# Altium PCB Hero_Chassis_PCB.PcbDoc
Units mil, origin at the board's own origin, x right, y up, seen from the top; angles counter-clockwise.
Board outline 2952.76 x 1771.65 mil, 2 copper layers (Top Layer, Bottom Layer); 15 components, 15 nets, 51 pads, 0 vias.
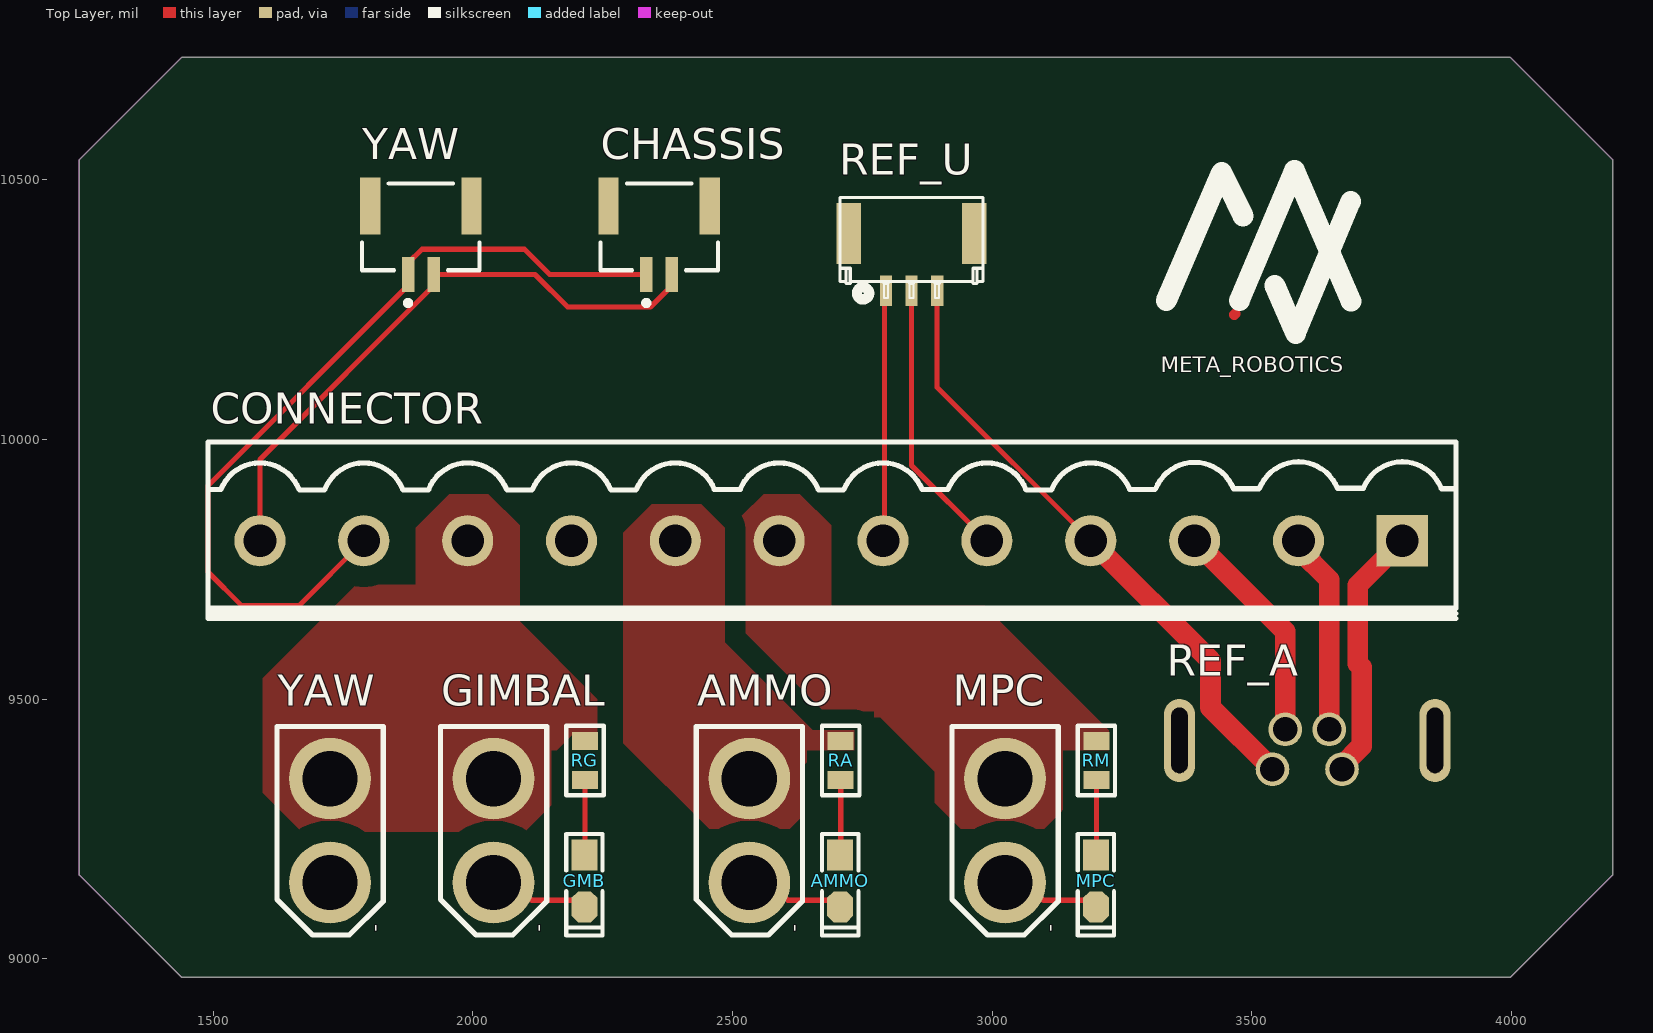
[diagram p0: Top Layer view]
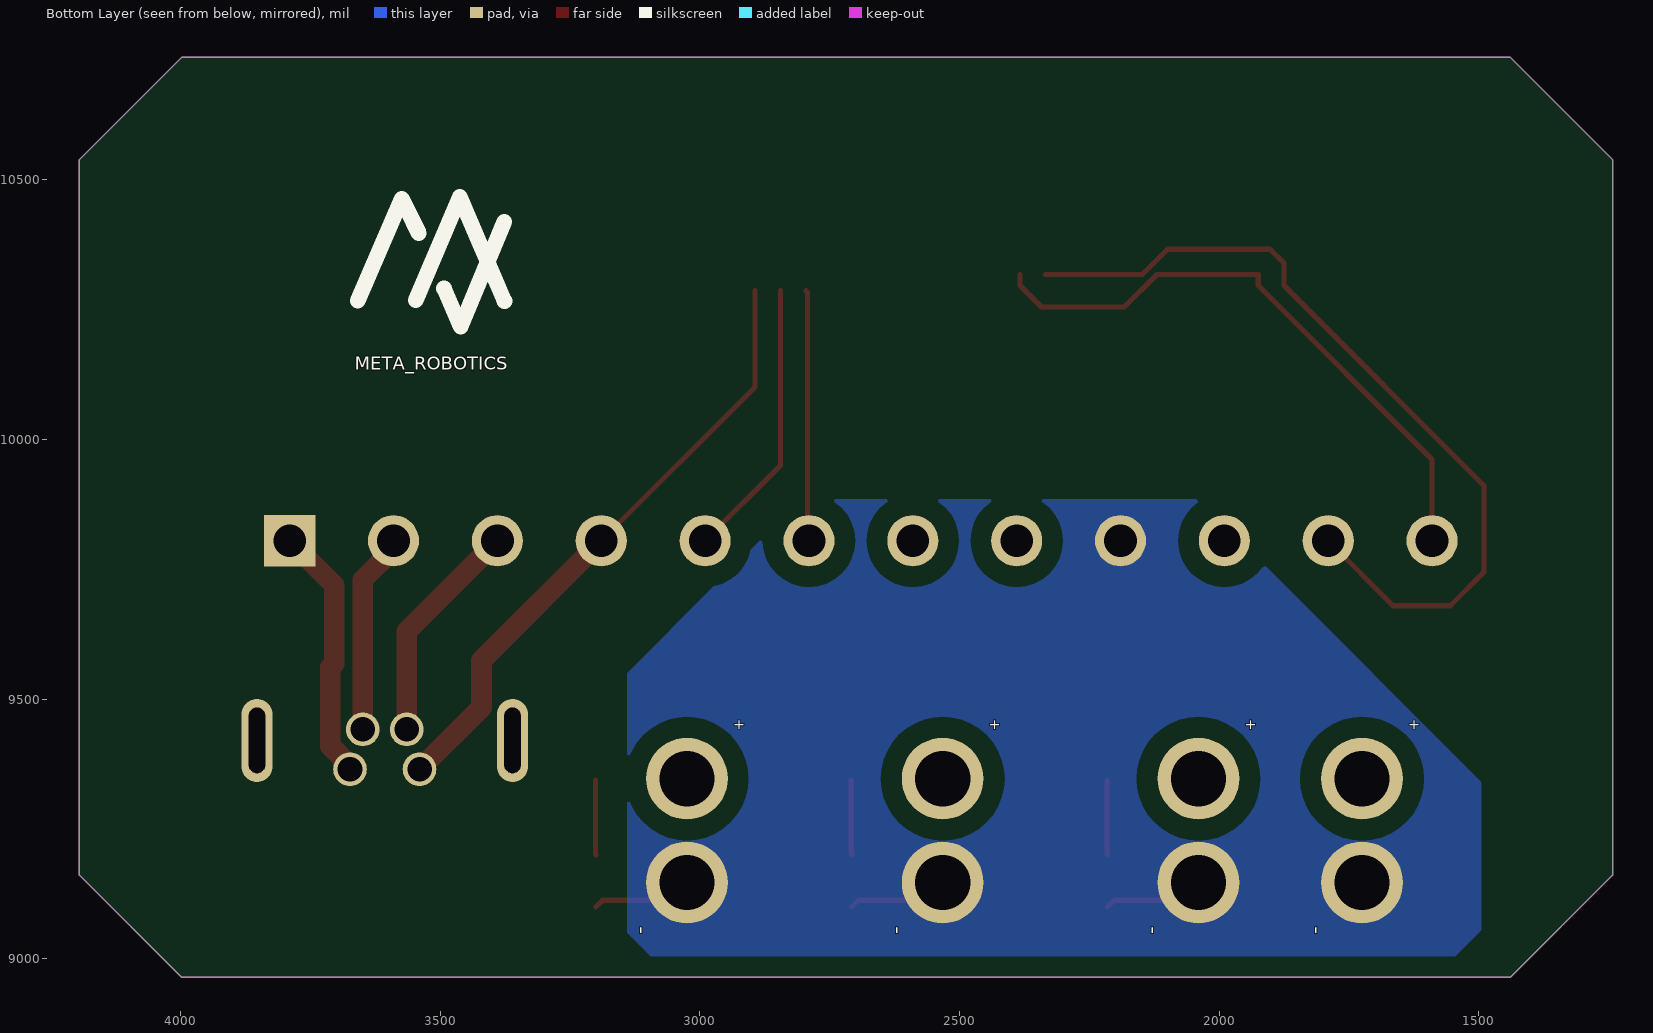
[diagram p1: Bottom Layer view, seen from below]

## Layer stack, top to bottom
Top Solder: solder mask 0.4, Solder Resist, Dk 3.5
Top Layer: signal copper 1.4
Dielectric 1: dielectric 12.6, FR-4, Dk 4.8
Bottom Layer: signal copper 1.4
Bottom Solder: solder mask 0.4, Solder Resist, Dk 3.5

## Board outline
1439.14,8964.25 1242.29,9161.1 1242.29,10539.05 1439.14,10735.9 3998.19,10735.9 4195.04,10539.05 4195.04,9161.1 3998.19,8964.25

## Design rules (kind name [scope] priority, off if disabled: settings)
Clearance [InPolygon] p1: gap=40 ignorepadtopadclearanceinfootprint=FALSE
PlaneClearance [All] p1: clearance=40
PlaneConnect [All] p1: planeconnectstyle=Direct reliefexpansion=20 reliefentries=4 reliefconductorwidth=10 reliefairgap=10
PolygonConnect [All] p1: connectstyle=Direct reliefconductorwidth=10 reliefentries=4 polygonreliefangle="90 Angle" airgapwidth=10
RoutingVias [All] p1: holewidth=28 width=50 viastyle="Through Hole" minholewidth=28 minwidth=50 maxholewidth=28 maxwidth=50
SolderMaskExpansion [All] p1: expansion=4 istentingtop=FALSE
Width [All] p1: maxlimit=80 minlimit=10 preferedwidth=40
28 further rules are at their usual default settings.

## Classes and differential pairs
component class Schematic: AMMO CHASSIS CONNECTOR GIMBAL GMB MPC RA REF_A REF_U RG RM YAW

## Components (designator, comment, footprint, x,y, rotation, side; value= is the part's Value field where it differs from the comment)
AMMO "XT PLUGIN" XT30-M 2532.5,9246.79 r270 top
AMMO "红色" "LED 0805G" 2707.5,9150 r270 top
CHASSIS "CAN1" JST-BM02B-GHS-TBT_V 2358.72,10383.95 r0 top
CONNECTOR "HDR-1X12" KF2EDGK5.08-LI-12P 2690,9805 r180 top
GIMBAL "XT PLUGIN" XT30-M 2040,9246.79 r270 top
GMB "红色" "LED 0805G" 2215.01,9150 r270 top
MPC "XT PLUGIN" XT30-M 3024.99,9246.79 r270 top
MPC "红色" "LED 0805G" 3200,9150 r270 top
RA "10K" "R 0805_L" 2708.51,9381.86 r270 top
REF_A "Referee_Air" "M8 Connector" 3606.93,9402.4 r0 top
REF_U "gh1.25_3p" GH1.25-LS-3P 2845,10385 r180 top
RG "10K" "R 0805_L" 2216.01,9381.86 r270 top
RM "10K" "R 0805_L" 3201,9381.86 r270 top
YAW "CAN1" JST-BM02B-GHS-TBT_V 1900,10383.95 r0 top
YAW "XT PLUGIN" XT30-M 1725,9246.79 r270 top

## Footprints (in the part's own frame and the unit in brackets; to place one, negate y for a bottom-side part, rotate by r counter-clockwise, add the part's x,y. Pads: shape width x height; smd on the part's side, far side on the other; paste and mask are expansions set on the pad)
GH1.25-LS-3P [mm] "A1257WR-S-3P"
  rect 1.2x3 smd: 0(-3.075,-0.3) 0(3.075,-0.3)
  rect 0.6x1.5 smd: 1(1.25,2.5) 2(0,2.5) 3(-1.25,2.5)
  silkscreen extent -3.5,-2.05 3.5,2.93, body extent -3.5,-2.15 3.5,2.25, height 4.2
JST-BM02B-GHS-TBT_V [mm] "Connector, 2-Leads, Body 5.75x4.25mm, Pitch 1.25mm"
  rect 0.6x1.7 smd: 1(-0.625,-1.675) 2(0.625,-1.675)
  rect 1x2.8 smd: MP1(-2.475,1.675) MP2(2.475,1.675)
  silkscreen extent -2.88,-3.2 2.88,2.78, body extent -2.88,-2.17 2.87,2.78, height 4.21
KF2EDGK5.08-LI-12P [mm] "立插端子"
  rect 2.5x2.5 hole 1.6: 1(-27.94,0)
  round 2.5 hole 1.6: 2(-22.86,0) 3(-17.78,0) 4(-12.7,0) 5(-7.62,0) 6(-2.54,0) 7(2.54,0) 8(7.62,0) 9(12.7,0) 10(17.78,0) 11(22.86,0) 12(27.94,0)
  silkscreen extent -30.56,-4.83 30.48,3.81, body extent -30.48,-4.75 30.48,3.75, height 11.25
"LED 0805G" [mil] "绿色0805LED                              淘宝ID:黄晶宝石"
  rect 60x50 smd: 1(-50,0)
  oct 60x50 smd: 2(50,0)
  silkscreen extent -90,-35 105,35, body extent -39,-25 39,25, height 32
"M8 Connector" [mm]
  round 1.65 hole 1.2: 0(-1.075,1) 1(1.075,1) 2(-1.7,-0.95) 3(1.7,-0.95)
  oval 1.524x4.064 hole 0.8 slot 3.2 at 90 deg: 4(-6.25,0.46) 5(6.25,0.46)
  body extent -6.25,-19.34 6.25,1.96, height 11.3
"R 0805_L" [mil] "1/8W贴片电阻"
  rect 35x50 smd: 1(-37.4,0) 2(37.4,0)
  silkscreen extent -67,-36 67,36, body extent -39,-25 39,25, height 20
XT30-M [mm]
  round 4 hole 2.7: 1(-2.54,0) 2(2.54,0)
  silkscreen extent -5.1,-2.6 5.11,2.6, body extent -5.18,-2.8 5.02,2.8, height 10.66

## Part data
AMMO GMB MPC: library part LED-SMD, "贴片LED", BOM名称=贴片LED, 学习资源=https://shop463601444.taobao.com, 版权归属="封装库来自淘宝 ID：黄晶宝石"
CHASSIS YAW: library part CMP-2000-05957-1, "Disconnectable Crimp Style Connector, Pitch 1.25 mm, 1 x 2 Position, Height 4.05 mm, -25 to 85 degC, RoHS, Tape and Reel", Color=Natural, Manufacturer=JST-Sales-America-Inc., Package Description="Disconnectable Crimp Style Connector, Pitch 1.25 mm, 1 x 2 Position, Height 4.05 mm", Package Reference=BM02B-GHS-TBT, Category=Connectors,Interconnects, Connector Type=Header,Shrouded, Contact Finish=Tin, Contact Finish Thickness=-, Contact Mating Length=-, Contact Type=OuterShroudContact, Datasheet URL=http://www.jst-mfg.com/product/pdf/eng/eGH.pdf, Datasheet Version=05/2016, Family=RectangularConnectors-Headers,MalePins, Fastening Type=LockingRamp, Features=SolderRetention, Manufacturer URL=http://www.jst.com/home2.html, Mounting Technology=SurfaceMount, Mounting Type=SurfaceMount, Number of Positions=2, Number of Positions Loaded=All, Number of Rows=1, Packaging=Digi-Reel®, Pitch="0.049\"(1.25mm)", Row Spacing=-, Series=GH, Termination=Solder
CONNECTOR: library part "Header 12", "12P接插件", BOM名称=12P接插件, 学习资源=https://shop463601444.taobao.com, 版权归属="封装库来自淘宝卖家 ID：黄晶宝石"
RA RG RM: library part R, "贴片电阻", BOM名称=贴片电阻, 封装库来自淘宝卖家 ID：黄晶宝石=其他店铺购入均为盗版，不享受售后技术支持服务，请立即申请退款, 版权归属="来自淘宝 ID：黄晶宝石", 联系售后=https://shop463601444.taobao.com

## Nets (pads, with @x,y where several pads share a name; then routed paths per layer and width w, separated by ;. In a path a pad name is that pad's centre, name@x,y a point inside that pad or via, vN(x,y) a via of type N, cw(c..) or ccw(c..) an arc to the next point about the centre after c; other vN are vias at no path point)
AMMO_DC: AMMO.1@2532.5,9346.79 CONNECTOR.8 RA.1
CAN2_H: CHASSIS.2 CONNECTOR.12 YAW.2@1924.61,10318.01 | length 1175.2
  Top Layer w10: CONNECTOR.12 1590,9961.75 1924.61,10296.35 1924.61,10318.01 2119.73,10318.01 2182.74,10255 2341.97,10255 2383.33,10296.35 CHASSIS.2
CAN2_L: CHASSIS.1 CONNECTOR.11 YAW.1@1875.39,10318.01 | length 1622.9
  Top Layer w10: CONNECTOR.11 1665,9680 1555,9680 1490,9745 1490,9910.96 1875.39,10296.35 1875.39,10318.01 1875.39,10339.66 1902.2,10366.47 2099.55,10366.47 2148.02,10318.01 CHASSIS.1
GIMBAL_DC: CONNECTOR.10 GIMBAL.1 RG.1 YAW.1@1725,9346.79
GND: AMMO.2 CONNECTOR.9 GIMBAL.2 GMB.2 MPC.2 YAW.2@1725,9146.79 | length 583.2
  Top Layer w10: GIMBAL.2 2079.91,9146.79 2114.2,9112.5 2202.51,9112.5 GMB.2 ; AMMO.2@2532.5,9146.79 2572.4,9146.79 2606.69,9112.5 2695,9112.5 AMMO.2@2707.5,9100 ; MPC.2@3024.99,9146.79 3064.9,9146.79 3099.19,9112.5 3187.5,9112.5 MPC.2@3200,9100
MPC_DC: CONNECTOR.7 MPC.1@3024.99,9346.79 RM.1
NetAMMO_1: AMMO.1@2707.5,9200 RA.2 | length 144.9
  Top Layer w10: AMMO.1@2707.5,9200 2708.5,9201 RA.2
NetGMB_1: GMB.1 RG.2 | length 144.9
  Top Layer w10: GMB.1 2216.01,9201 RG.2
NetMPC_1: MPC.1@3200,9200 RM.2 | length 144.9
  Top Layer w10: MPC.1@3200,9200 3201,9201 RM.2
REFEREE_A1: CONNECTOR.3 REF_A.0 | length 435.6
  Top Layer w40: CONNECTOR.3 3564.61,9630.39 REF_A.0
REFEREE_A2: CONNECTOR.2 REF_A.1 | length 387.8
  Top Layer w40: CONNECTOR.2 3590,9789.19 3649.25,9729.94 REF_A.1
REFEREE_A3: CONNECTOR.1 REF_A.3 | length 494.3
  Top Layer w40: REF_A.3 3673.86,9371.75 3711.73,9409.63 3711.73,9560.67 3704.23,9568.18 3704.23,9719.22 CONNECTOR.1
REFEREE_GND: CONNECTOR.4 REF_A.2 REF_U.3 | length 1189.1
  Top Layer w10: REF_U.3 2894.21,10100.79 CONNECTOR.4
  Top Layer w40: CONNECTOR.4 3420.87,9574.13 3420.87,9484.13 REF_A.2
REFEREE_UR: CONNECTOR.5 REF_U.2 | length 541.6
  Top Layer w10: REF_U.2 2845,9950 CONNECTOR.5
REFEREE_UT: CONNECTOR.6 REF_U.1 | length 484
  Top Layer w10: CONNECTOR.6 2792.89,9807.89 2792.89,10283.68 REF_U.1
pads on no net: CHASSIS.MP1 CHASSIS.MP2 REF_A.4 REF_A.5 REF_U.0 YAW.MP1 YAW.MP2
copper on no net: | length 2.6
  Top Layer w20: 3466.57,10240.39 3468.39,10242.2

## Polygon pours and split planes (outlines as drawn)
MPC_DC on Top Layer "MPC_DC_L01_P004" (solid, pour order 4): 2500,9620 2655,9465 2785,9465 2890,9360 2890,9300 2940,9250 3100,9250 3145,9295 3145,9400 3225,9400 3225,9440 2985,9680 2690,9680 2690,9835 2630,9895 2560,9895 2500,9835
AMMO_DC on Top Layer "AMMO_DC_L01_P003" (solid, pour order 3): 2345,9875 2440,9875 2485,9830 2485,9610 2655,9440 2735,9440 2735,9400 2665,9400 2635,9370 2635,9275 2610,9250 2455,9250 2290,9415 2290,9820
GIMBAL_DC on Top Layer "GIMBAL_DC_L01_P000" (solid, pour order 0): 1955,9895 1890,9830 1890,9720 1775,9720 1595,9540 1595,9320 1670,9245 2100,9245 2155,9300 2155,9395 2195,9435 2240,9435 2240,9500 2090,9650 2090,9835 2030,9895
GND on Bottom Layer "GND" (solid, pour order 5): 2040,9885 1495,9340 1495,9055 1565,8985 3075,8985 3140,9050 3140,9550 2805,9885

## Keep-outs
Keep-Out Layer:
  the board outline again, w0.5

## Silkscreen, mask and mechanical layers (free items; w line width, h text height)
Top Overlay:
  lines w40: 3335.34,10267.42 3442.15,10514.39 3483.19,10430.63 ; 3476.43,10267.91 3582.28,10518.6 3691.11,10266.31 ; 3544.35,10296.74 3584.6,10204.3 3690.53,10458.43
  text "META_ROBOTICS" at 3325,10130 h30
Bottom Overlay:
  lines w30: 3376.36,10266.7 3462.8,10467.09 3546.88,10267.97 ; 3376.82,10419.3 3460.96,10217.44 3492.93,10290.87 ; 3541.51,10397.22 3574.11,10463.74 3658.95,10267.58
  text "META_ROBOTICS" at 3665,10134.17 h25
Mechanical 1:
  the board outline again, w0.5

## Text inside footprints (layer, text, board x,y; h text height)
AMMO: Top Overlay "-" at 2609.5,9066.79 h30 r270; Bottom Overlay "-" at 2609.5,9046.79 h30 r270; Bottom Overlay "+" at 2423.26,9438.9 h20 r270
GIMBAL: Top Overlay "-" at 2117,9066.79 h30 r270; Bottom Overlay "-" at 2117,9046.79 h30 r270; Bottom Overlay "+" at 1930.76,9438.9 h20 r270
MPC: Top Overlay "-" at 3101.99,9066.79 h30 r270; Bottom Overlay "-" at 3101.99,9046.79 h30 r270; Bottom Overlay "+" at 2915.76,9438.9 h20 r270
YAW: Top Overlay "-" at 1802,9066.79 h30 r270; Bottom Overlay "-" at 1802,9046.79 h30 r270; Bottom Overlay "+" at 1615.76,9438.9 h20 r270